# Altium PCB Game_Consol2.PcbDoc
Units mil, origin at the board's own origin, x right, y up, seen from the top; angles counter-clockwise.
Board outline 3090.55 x 1732.28 mil, 2 copper layers (Top Layer, Bottom Layer); 55 components, 43 nets, 220 pads, 69 vias.
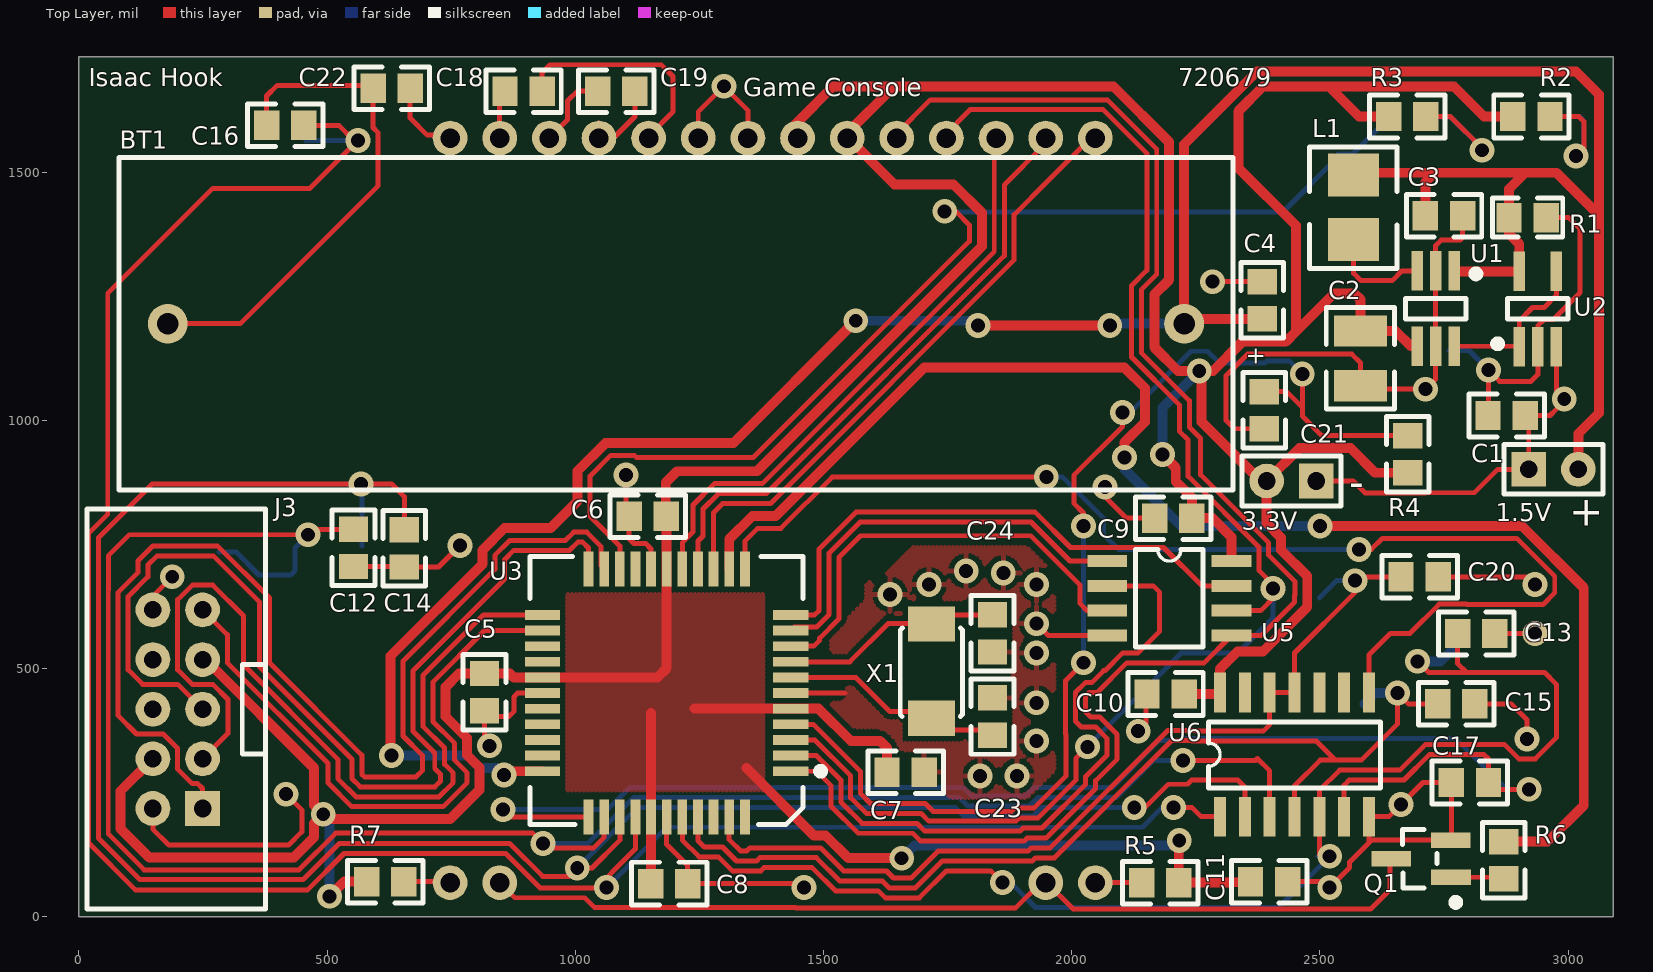
[diagram p0: Top Layer view]
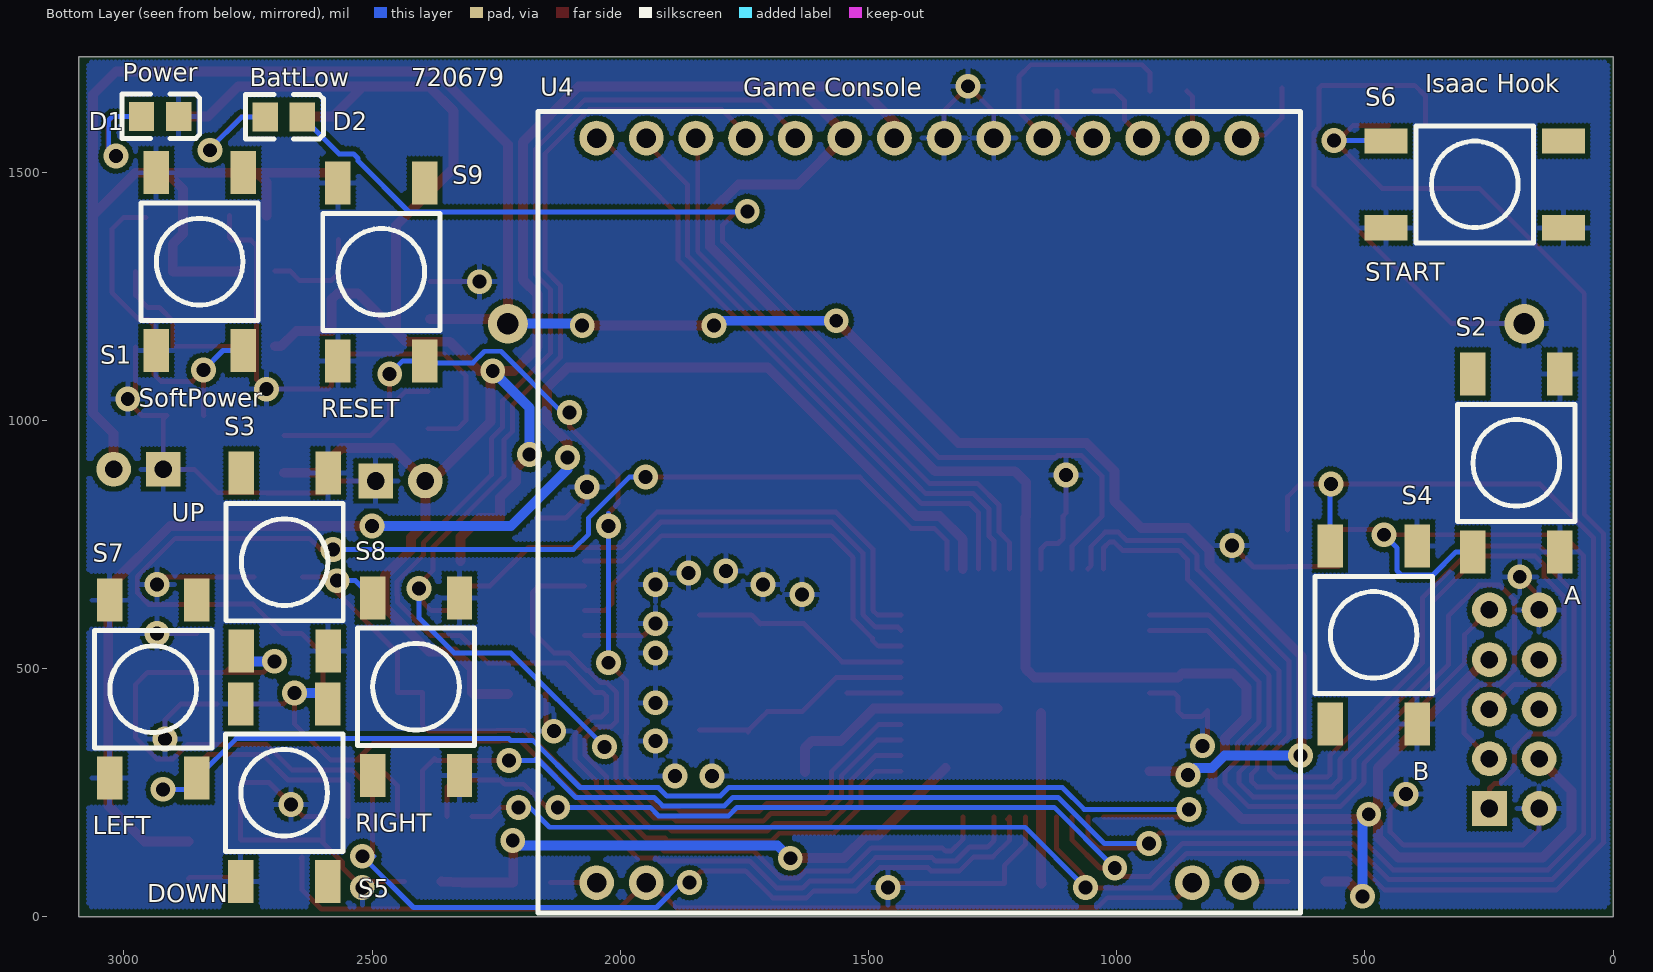
[diagram p1: Bottom Layer view, seen from below]
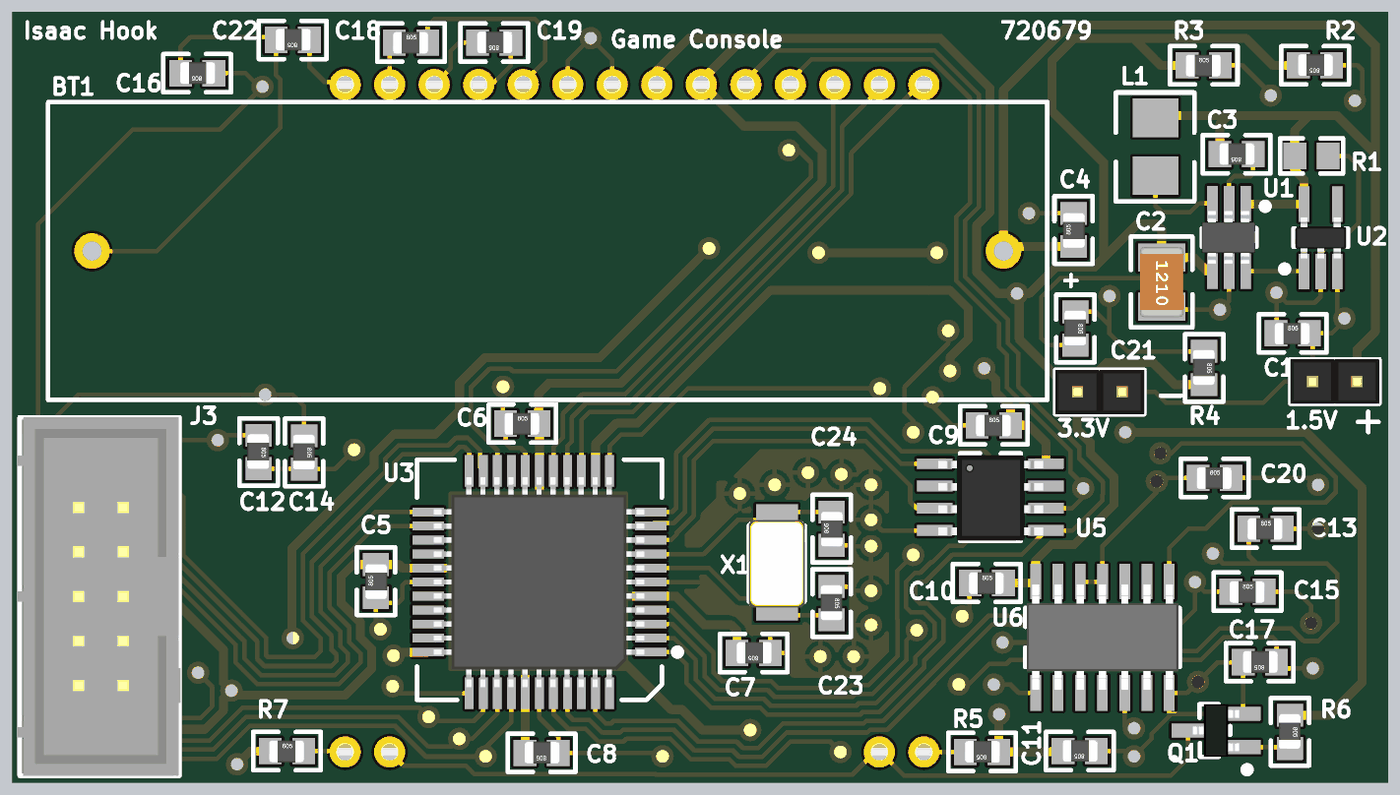
[diagram p2: 3D render of the assembled board from above, using the file's embedded part models]
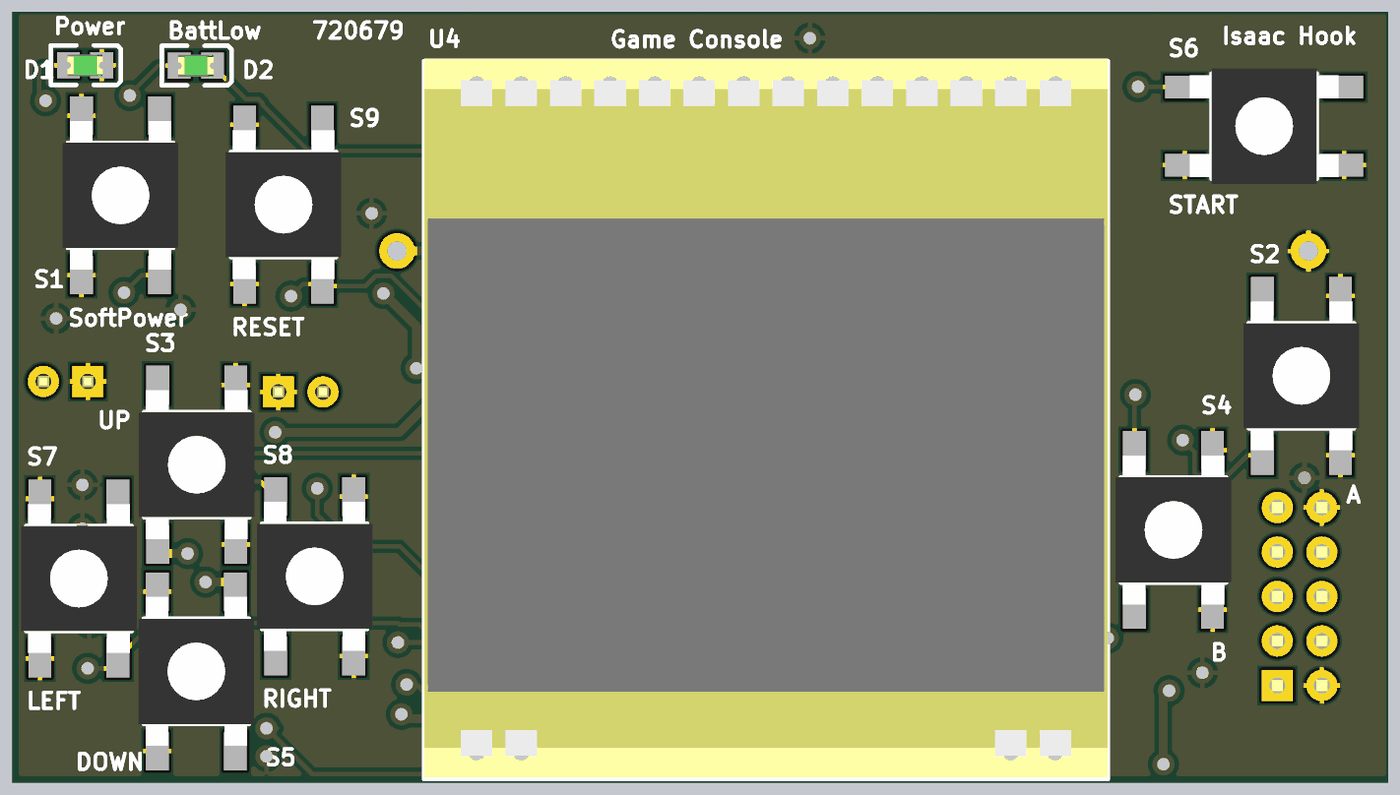
[diagram p3: 3D render of the assembled board from below, using the file's embedded part models]

## Layer stack, top to bottom
Top Solder: solder mask 0.4, Solder Resist, Dk 3.5
Top Layer: signal copper 1.4
Dielectric1: dielectric 12.6, FR-4, Dk 4.8
Bottom Layer: signal copper 1.4
Bottom Solder: solder mask 0.4, Solder Resist, Dk 3.5

## Board outline
0,0 0,1732.28 3090.55,1732.28 3090.55,0

## Design rules (kind name [scope] priority, off if disabled: settings)
Clearance [All] p1: gap=10
ComponentClearance [All] p1 off: gap=10 collisioncheckmode=3 verticalgap=10 showdistances=FALSE
DiffPairsRouting [All] p1: maxlimit=20 minlimit=10 mostfreqgap=10 toplayer_minwidth=15 toplayer_maxwidth=15 toplayer_prefwidth=15 bottomlayer_minwidth=15 bottomlayer_maxwidth=15 bottomlayer_prefwidth=15 maxuncoupledlength=500
FabricationTestPointUsage TestPointUsage [All] p1: valid=0 allowmultiple=FALSE
FabricationTestpoint Testpoint [All] p1: side=3 testpointundercomponent=TRUE minsize=40 maxsize=100 preferedsize=60 minholesize=0 maxholesize=40 preferedholesize=32 testpointgrid=1 allowsidetop=TRUE allowsidebottom=TRUE usegrid=TRUE gridtolerance=0.01
Height [All] p1: minheight=0 maxheight=7874.02 prefheight=500
HoleSize [All] p1: absolutevalues=TRUE maxlimit=199 minlimit=15 maxpercent=80.000 minpercent=20.000
MinimumAnnularRing [All] p1: minimumring=5
PolygonConnect [All] p1: connectstyle=Relief reliefconductorwidth=10 reliefentries=4 polygonreliefangle="90 Angle" airgapwidth=10
RoutingVias [All] p1: holewidth=20 width=40 viastyle="Through Hole" minholewidth=15 minwidth=25 maxholewidth=80 maxwidth=100
SilkToSolderMaskClearance SilkscreenOverComponentPads [IsPad] p1: minsilkscreentomaskgap=10 clearancetoexposedcopper=TRUE
SolderMaskExpansion [All] p1: expansion=6
Width [All] p1: maxlimit=1000 minlimit=6 preferedwidth=10 minimp=50.000000 maximp=50.000000 favimp=50.000000
23 further rules are at their usual default settings.

## Classes and differential pairs
component class Game_Consol_Top: C12 C13 C14 C15 C16 C17 C18 C19 C20 C21 C22 C23 C24 J3 Q1 R4 R5 R6 R7 S2 S3 S4 S5 S6 S7 S8 S9 U3 U4 U5 U6 X1
component class Game_Consol_Power: 1.5V 3.3V BT1 C1 C2 C3 C4 C5 C6 C7 C8 C9 C10 C11 D1 D2 L1 R1 R2 R3 S1 U1 U2

## Components (designator, comment, footprint, x,y, rotation, side; value= is the part's Value field where it differs from the comment)
1.5V "1.5V" HDR1X2 2920.67,901.57 r0 top
3.3V "3.3V" HDR1X2 2492.72,877.95 r180 top
BT1 "1.5v" BATT_HOLDER 1202.76,1194.88 r0 top
C1 "100nF" 0805 2875.98,1009.84 r0 top
C2 "22uF" 1210 2581.69,1125 r270 top
C3 "1uF" 0805 2750,1412.4 r180 top
C4 "100nF" 0805 2383.86,1242.13 r90 top
C5 "100nF" 0805 816.93,452.76 r90 top
C6 "100nF" 0805 1145.67,807.09 r0 top
C7 "100nF" 0805 1665.35,291.34 r180 top
C8 "100nF" 0805 1188.98,66.93 r180 top
C9 "100nF" 0805 2204.72,803.15 r0 top
C10 "100nF" 0805 2188.98,448.82 r0 top
C11 "100nF" 0805 2397.64,70.87 r180 top
C12 "BTN_A" 0805 553.15,743.11 r270 top
C13 "BTN_UP" 0805 2814.96,570.87 r0 top
C14 "BTN_B" 0805 655.51,742.13 r270 top
C15 "BTN_DOWN" 0805 2774.61,429.13 r0 top
C16 "BTN_Start" 0805 415.35,1594.49 r180 top
C17 "BTN_LEFT" 0805 2802.17,270.67 r180 top
C18 "1uF" 0805 895.67,1663.39 r0 top
C19 "1uF" 0805 1082.68,1663.39 r180 top
C20 "BTN_RIGHT" 0805 2700.79,685.04 r0 top
C21 "BTN_RESET" 0805 2387.8,1020.67 r270 top
C22 "1uF" 0805 629.92,1669.29 r180 top
C23 "18pF" 0805 1840.55,403.54 r270 top
C24 "18pF" 0805 1840.55,570.87 r90 top
D1 "Power" 0805D 2927.16,1612.2 r0 bottom
D2 "BattLow" 0805D 2678.15,1611.22 r0 bottom
J3 "JTAG" BOXEDVERT10 249.02,218.31 r90 top
L1 "4.7uH" 1210L 2567.91,1429.13 r90 top
Q1 "RTR025N03TL" SOT23 2703.74,117.13 r180 top
R1 "10k" 0805 2918.31,1408.46 r180 top
R2 "1k" 0805 2926.18,1612.2 r180 top
R3 "1k" 0805 2676.18,1612.2 r0 top
R4 "10k" 0805 2677.17,932.09 r270 top
R5 "10k" 0805 2178.15,68.9 r180 top
R6 "10k" 0805 2870.08,114.17 r270 top
R7 "10k" 0805 617.13,70.87 r0 top
S1 "SoftPower" SPNO_SMD 2847.44,1319.88 r270 bottom
S2 "A" SPNO_SMD 194.88,914.37 r90 bottom
S3 "UP" SPNO_SMD 2676.18,714.57 r90 bottom
S4 "B" SPNO_SMD 482.28,567.91 r90 bottom
S5 "DOWN" SPNO_SMD 2677.16,250 r270 bottom
S6 "START" SPNO_SMD 278.54,1475.39 r180 bottom
S7 "LEFT" SPNO_SMD 2940.94,458.66 r270 bottom
S8 "RIGHT" SPNO_SMD 2411.42,463.58 r90 bottom
S9 "RESET" SPNO_SMD 2481.3,1299.21 r270 bottom
U1 "SC120" SOT23-6 2733.27,1225.39 r270 top
U2 "74AUG1G80" SOT23-5 2938.98,1224.41 r90 top
U3 "ATMEGA16" QFP-48 1184.06,450.79 r180 top
U4 "EA DOGS102x-6" "EA DOGS102x" 1397.64,818.9 r180 bottom
U5 "FM25L04B" SOIC-8 2196.85,641.73 r0 top
U6 "74AHC30" SOIC-14 2448.82,326.77 r90 top
X1 "7.68Mhz" XTAL_FLAT_SMD 1717.52,495.08 r90 top

## Footprints (in the part's own frame and the unit in brackets; to place one, negate y for a bottom-side part, rotate by r counter-clockwise, add the part's x,y. Pads: shape width x height; smd on the part's side, far side on the other; paste and mask are expansions set on the pad)
0805 [mm] "0805 Footprint"
  rect 1.3x1.5 smd: 1(-0.95,0) 2(0.95,0)
  silkscreen extent -1.93,-1.09 1.93,1.09, body extent -1.03,-0.64 0.97,0.61, height 0.8
0805D [mm] "0805 Diode"
  rect 1.3x1.5 smd: A(0.95,0) K(-0.95,0)
  silkscreen extent -2.03,-1.14 1.95,1.12, body extent -1.01,-0.62 1.01,0.63, height 1.1
1210 [mm]
  rect 1.6x2.7 smd: 1(-1.4,0) 2(1.4,0)
  silkscreen extent -2.6,-1.75 2.6,1.75, body extent -2,-1.24 2,1.24, height 1.72
1210L [mm] "Precision Wire Wound Inductor, 2-Leads, Body 3.2x3.2mm, IPC Low Density"
  rect 2.2x2.6 smd: 1(-1.651,0) 2(1.651,0)
  silkscreen extent -3.12,-2.21 3.1,2.26, body extent -1.75,-1.75 1.75,1.75, height 2.2
BATT_HOLDER [mil]
  round 80 hole 43.31: 1(1023.62,0) 2(-1023.62,0)
  silkscreen extent -1122,-335 1122,335
BOXEDVERT10 [mil] "IDC Header 2.54mm Boxed 10 pins"
  rect 70x70 hole 35.43: 1(0,0)
  round 70 hole 35.43: 2(0,100) 3(100,0) 4(100,100) 5(200,0) 6(200,100) 7(300,0) 8(300,100) 9(400,0) 10(400,100)
  silkscreen extent -203,-127 603,232, body extent -204,-129 604,237, height 359
"EA DOGS102x" [mil] "graphics display footprint"
  round 70 hole 39.37: 1(-650,-750) 2(-550,-750) 13(550,-750) 14(650,-750) 15(650,750) 16(550,750) 17(450,750) 18(350,750) 19(250,750) 20(150,750) 21(50,750) 22(-50,750) 23(-150,750) 24(-250,750) 25(-350,750) 26(-450,750) 27(-550,750) 28(-650,750)
  silkscreen extent -768,-811 768,803, body extent -768,-807 768,807, height 213
HDR1X2 [mil] "Connector; Header; 2 Position"
  rect 70x70 hole 35.43: 1(0,0)
  round 70 hole 35.43: 2(100,0)
  silkscreen extent -50,-50 150,50, body extent -50,-50 150,50, height 333
QFP-48 [mm]
  rect 1.8x0.5 smd: 1(-6.35,4) 2(-6.35,3.2) 3(-6.35,2.4) 4(-6.35,1.6) 5(-6.35,0.8) 6(-6.35,0) 7(-6.35,-0.8) 8(-6.35,-1.6) 9(-6.35,-2.4) 10(-6.35,-3.2) 11(-6.35,-4) 23(6.35,-4) 24(6.35,-3.2) 25(6.35,-2.4) 26(6.35,-1.6) 27(6.35,-0.8) 28(6.35,0) 29(6.35,0.8) 30(6.35,1.6) 31(6.35,2.4) 32(6.35,3.2) 33(6.35,4)
  rect 0.5x1.8 smd: 12(-4,-6.35) 13(-3.2,-6.35) 14(-2.4,-6.35) 15(-1.6,-6.35) 16(-0.8,-6.35) 17(0,-6.35) 18(0.8,-6.35) 19(1.6,-6.35) 20(2.4,-6.35) 21(3.2,-6.35) 22(4,-6.35) 34(4,6.35) 35(3.2,6.35) 36(2.4,6.35) 37(1.6,6.35) 38(0.8,6.35) 39(0,6.35) 40(-0.8,6.35) 41(-1.6,6.35) 42(-2.4,6.35) 43(-3.2,6.35) 44(-4,6.35)
  silkscreen extent -8,-6.99 6.98,6.73, body extent -5.97,-6 6.03,6, height 1.13
SOIC-8 [mil] "SOIC-8 Footprint"
  rect 80x24 smd: 1(-125,75) 2(-125,25) 3(-125,-25) 4(-125,-75) 5(125,-75) 6(125,-25) 7(125,25) 8(125,75)
  silkscreen extent -68,-98 68,98, body extent -117,-98 119,94, height 67
SOIC-14 [mil] "SOIC-14 Footprint"
  rect 80x24 smd: 1(-125,150) 2(-125,100) 3(-125,50) 4(-125,0) 5(-125,-50) 6(-125,-100) 7(-125,-150)
  rect 80x24.02 smd: 8(125,-150) 9(125,-100) 10(125,-50) 11(125,0) 12(125,50) 13(125,100) 14(125,150)
  silkscreen extent -67,-173 66,173, body extent -118,-170 118,170, height 61
SOT23 [mil] "SOT23, 3-Leads, Body 3.0x2.5mm (max), Pitch 0.95mm, IPC Low Density"
  rect 80.24x31.5 smd: 1(-60,37.4)
  rect 80x31.5 smd: 2(-60,-37.4) 3(60,0)
  silkscreen extent -75,-59 37,93, body extent -52,-59 52,59, height 43
SOT23-5 [mm]
  rect 2.032x0.6 smd: 1(-1.929,0.95) 2(-1.929,0) 3(-1.929,-0.95) 4(1.929,-0.95) 5(1.929,0.95)
  silkscreen extent -1.9,-1.55 0.53,2.18, body extent -1.17,-1.46 1.17,1.46, height 1.02
SOT23-6 [mm]
  rect 2.032x0.6 smd: 1(-1.929,0.95) 2(-1.929,0) 3(-1.929,-0.95) 4(1.929,-0.95) 5(1.929,0) 6(1.929,0.95)
  silkscreen extent -1.9,-1.55 0.53,2.18, body extent -1.5,-1.56 1.5,1.49, height 1.42
SPNO_SMD [mm] "SP NO SMD Tactile switch"
  rect 2.2x1.3 smd: 1(-4.55,-2.225) 2(4.55,-2.225) 3(-4.55,2.225) 4(4.55,2.225)
  silkscreen extent -3,-3 3,3, body extent -4.25,-3.3 4.25,3.3, height 4.32
XTAL_FLAT_SMD [mm]
  rect 1.8x2.4 smd: 1(-2.413,0) 2(2.412,0)
  silkscreen extent -2.33,-1.59 2.21,1.6, body extent -2.58,-1.6 2.42,1.6, height 1.02

## Part data
1.5V 3.3V: library part HDR2, "2 Pin Header"
BT1: library part BAT, "Battery Holder AA 1.5v"
C1 C3 C4 C5 C6 C7 C8 C9 C10 C11 C12 C13 C14 C15 C16 C17 C18 C19 C20 C21 C22 C23 C24: library part "C 0805", "Capacitor 100nF"
C2: library part "C 1210", "Capacitor 22uF"
D1: library part "LED GREEN", "Light Emitting Diode"
D2: library part "LED RED", "Light Emitting Diode"
J3: library part JTAG_CON, "JTAG ATMEL connector"
L1: library part "I 1210", "Inductor 4.7uH"
Q1: library part MOSFET-N, "N-Channel MOSFET"
R1 R2 R3 R4 R5 R6 R7: library part R, "Resistor"
S1 S2 S3 S4 S5 S6 S7 S8 S9: library part SW-PB, "Push Button Switch"
U1: "Regulator Low Voltage"
U2: "Inverted single D flip flop"
U3: "ATMEGA16 Microcontroller"
U4: "LCD 102x64-pixel with backlight"
U5: "FRAM 4Kb Memory"
U6: "1 x 8 Input NAND gate"
X1: library part XTAL, "Crystal Oscillator"

## Via types
v1: diameter 50, hole 28, Top Layer to Bottom Layer, tented both sides, 69 vias

## Nets (pads, with @x,y where several pads share a name; then routed paths per layer and width w, separated by ;. In a path a pad name is that pad's centre, name@x,y a point inside that pad or via, vN(x,y) a via of type N, cw(c..) or ccw(c..) an arc to the next point about the centre after c; other vN are vias at no path point)
BATTERYLOWLED: D2.K U3.20 | length 2268.2
  Top Layer w10: U3.20 1089.57,747.05 1029.53,807.09 1029.53,887.8 1071.5,929.76 1118.93,929.76 1123.5,925.2 1358.29,925.2 1793.9,1360.8 1793.9,1393.7 1766.34,1421.26 v1(1744.09,1421.26) v1@1757.4,1407.95
  Bottom Layer w10: v1(1744.09,1421.26) 1745.31,1420.04 2425.51,1420.04 2528.31,1522.84 2528.31,1527.87 2537.09,1536.65 2566.18,1536.65 D2.K
BTN_A: C12.1 S2.3 U3.35 U6.3 | length 4118.9
  Top Layer w10: C12.1 472.44,780.51 v1(461.61,769.69) 101.69,769.69 59.37,727.36 59.37,658.26 59.02,657.91 59.02,167.1 131.32,94.8 443.23,94.8 517.05,168.62 914.06,168.62 v1(935.04,147.64) 944.25,138.43 1036.27,138.43 1058.07,160.23 U3.35 ; v1(2224.41,314.96) 2370.08,314.96 2374.02,318.9 2398.82,294.09 U6.3
  Bottom Layer w10: S2.3 316.39,735.24 362.88,688.74 426.49,688.74 435.28,697.53 435.28,743.35 v1(461.61,769.69) ; v1(935.04,147.64) 1024.87,147.64 1117.7,240.47 1773.1,240.47 1790.11,223.46 1914.62,223.46 1931.63,240.47 2089.42,240.47 2167.84,318.9 2171.78,314.96 v1(2224.41,314.96)
  Bottom Layer w20: v1(461.61,769.69) v1@461.61,777.3
BTN_B: C14.1 S4.4 U3.36 U6.2 | length 4186.8
  Top Layer w10: C14.1 655.51,846.46 629.92,872.05 v1(567.91,872.05) 147.64,872.05 39.37,763.78 39.37,666.55 39.02,666.19 39.02,158.82 123.03,74.8 451.51,74.8 524.39,147.68 867.85,147.68 934.06,81.48 986.99,81.48 v1(1003.94,98.43) 1033.46,98.43 1089.57,154.53 U3.36 ; v1(2125.98,220.47) 2148.16,220.47 2194.77,267.09 2233.1,267.09 2241.61,275.59 2334.65,275.59 2348.82,261.42 U6.2
  Bottom Layer w10: v1(567.91,872.05) 569.88,870.08 S4.4 ; v1(1003.94,98.43) 1125.98,220.47 1764.82,220.47 1781.83,203.46 1922.9,203.46 1939.91,220.47 v1(2125.98,220.47)
BTN_DOWN: C15.1 S5.3 U3.41 U6.4 | length 2065
  Top Layer w10: U3.41 1247.05,153.54 1259.84,140.75 1296.52,140.75 1324.67,112.6 1365.29,112.6 1371.75,119.06 1485.48,119.06 1532.35,72.19 1618.55,72.19 1632.63,58.11 1684.82,58.11 1739.31,112.6 1920.63,112.6 1926.93,118.9 1965.36,118.9 2070.87,224.41 2070.87,224.72 2201.11,354.96 2240.98,354.96 2241.92,354.02 2492.98,354.02 2531.4,315.59 ; U6.4 2448.82,263.78 2500.63,315.59 2531.4,315.59 ; C15.1 2678.15,429.13 v1(2656.5,450.79) 2656.5,388.78 2583.31,315.59 2531.4,315.59
  Bottom Layer w20: S5.3 2611.22,450.79 v1(2656.5,450.79)
BTN_LEFT: C17.1 S7.4 U3.34 U6.6 | length 2890.2
  Top Layer w10: v1(854.33,216.54) 870.08,200.79 U3.34 ; U6.6 2548.82,265.35 2559.06,275.59 2669.29,275.59 2720.47,326.77 2830.71,326.77 2839.57,317.91 C17.1 2853.35,256.89 v1(2921.26,256.89)
  Bottom Layer w10: v1(854.33,216.54) 1065.48,216.54 1109.42,260.47 1781.39,260.47 1798.39,243.46 1906.33,243.46 1923.34,260.47 2081.13,260.47 2175.62,354.96 2220.47,354.96 2224.41,358.9 2773.98,358.9 S7.4 2875.98,256.89 v1@2919.29,256.89 ; v1(2921.26,256.89) v1@2919.29,256.89 ; v1@2927.16,249.02 v1@2919.29,256.89
BTN_RESET: C21.1 R4.1 S9.4 U3.4 | length 2350.8
  Top Layer w10: U3.4 1479.33,387.8 1574.8,292.32 1574.8,248.03 1594.49,228.35 1704.72,228.35 1720.47,212.6 1879.21,212.6 1885.51,218.9 1923.62,218.9 1988.19,283.46 1988.19,367.27 1987.56,367.9 1987.56,475.75 v1(2023.62,511.81) ; v1(2023.62,787.4) 2023.62,813.51 2004.3,832.84 2004.3,889.4 2102.36,987.46 v1(2102.36,1015.75) ; C21.1 2433.07,1058.07 2464.57,1026.57 ; v1(2464.57,1093.5) 2464.57,1026.57 ; R4.1 2503.94,969.49 2464.57,1008.86 2464.57,1026.57
  Bottom Layer w10: v1(2023.62,511.81) v1(2023.62,787.4) 2023.62,812.99 ; v1@2102.36,1023.62 v1(2102.36,1015.75) 2116.66,1015.75 2240.32,1139.41 2273.46,1139.41 2296.89,1115.98 2389.6,1115.98 S9.4 2437.99,1120.08 v1(2464.57,1093.5)
BTN_RIGHT: C20.1 S8.4 U3.43 U6.11 U6.12 | length 1880.7
  Top Layer w10: U3.43 1310.04,155.51 1332.95,132.6 1344.98,132.6 1351.44,139.06 1493.77,139.06 1540.63,92.19 1626.83,92.19 1640.91,78.11 1676.54,78.11 1731.02,132.6 1912.34,132.6 1918.64,138.9 1956.76,138.9 2192.82,374.96 2249.26,374.96 2250.21,374.02 2385.83,374.02 2398.82,387.01 U6.12 U6.11 2448.82,531.5 2570.87,653.54 v1(2570.87,677.16) 2562.99,677.16 2555.12,685.04 C20.1@2639.76,685.04
  Bottom Layer w10: S8.4 2533.46,677.16 v1(2570.87,677.16)
BTN_SP_CLK: C1.1 R1.1 S1.4 U2.2 | length 719.4
  Top Layer w10: C1.1 2839.57,1010.83 v1(2839.57,1101.38) 2862.2,1078.74 2925.2,1078.74 2938.98,1092.52 U2.2 2938.98,1190.94 2951.51,1203.48 2969.95,1203.48 3024.21,1257.74 3024.21,1385.24 3000.98,1408.47 R1.1
  Bottom Layer w10: S1.4 2800.2,1140.75 v1(2839.57,1101.38)
BTN_START: C16.1 S6.3 U3.37 U6.1 | length 4581.1
  Top Layer w10: C16.1 523.62,1594.49 554.13,1563.98 v1(562.01,1563.98) 465.55,1467.52 269.69,1467.52 58.07,1255.91 58.07,810.76 19.02,771.71 19.02,150.38 18.43,149.79 114.36,53.86 460.19,53.86 534.01,127.68 859.57,127.68 928.82,58.43 1062.36,58.43 v1(1062.99,59.06) ; v1@1062.99,78.73 1082.68,98.42 1121.06,136.81 U3.37 ; v1(2204.72,220.47) 2242.12,220.47 2260.83,201.77 U6.1
  Bottom Layer w10: S6.3 458.66,1563.98 v1(562.01,1563.98) ; v1(1062.99,59.06) 1184.41,180.47 2142.55,180.47 2182.55,220.47 v1(2204.72,220.47)
BTN_UP: C13.1 S3.3 U3.40 U6.5 | length 2794.4
  Top Layer w10: U3.40@1219.75,196.59 U3.40 1215.55,154.53 1249.33,120.75 1288.23,120.75 1316.38,92.6 1373.58,92.6 1380.03,99.06 1477.2,99.06 1524.06,52.19 1610.26,52.19 1624.34,38.11 1693.1,38.11 1747.59,92.6 1836.54,92.6 v1(1860.24,68.9) ; v1(2519.69,122.05) 2501.58,122.05 2498.82,124.8 U6.5 2498.82,254.72 2539.69,295.59 2661.01,295.59 2712.19,346.77 2872.25,346.77 2900.75,318.27 2933.89,318.27 2976.38,360.75 2976.38,468.5 2952.76,492.13 2795.28,492.13 ; v1(2696.85,514.76) 2719.49,492.13 2795.28,492.13 ; C13.1 2777.56,509.84 2795.28,492.13
  Bottom Layer w10: v1(1860.24,68.9) 1876.93,68.9 1926.93,18.9 2416.54,18.9 v1(2519.69,122.05) v1@2496.06,122.05
  Bottom Layer w20: v1(2696.85,514.76) 2743.11,514.76 S3.3
GND: 1.5V.1 3.3V.1 BT1.2 C1.2 C2.2 C3.1 C4.2 C5.1 C6.1 C7.1 C8.1 C9.1 C10.1 C11.1 C12.2 C13.2 C14.2 C15.2 C16.2 C17.2 C20.2 C21.2 C22.2 C23.1 C24.1 D1.K J3.2 J3.10 Q1.2 S1.1 S1.2 S2.1 S2.2 S3.1 S3.2 S4.1 S4.2 S5.1 S5.2 S6.1 S6.2 S7.1 S7.2 S8.1 S8.2 S9.1 S9.2 U1.2 U1.5 U2.3 U3.6 U3.18 U3.28 U3.39 U4.20 U4.21 U5.4 U6.7 | length 6447.1
  Top Layer w10: J3.2 149.02,176.77 180.98,144.8 422.52,144.8 448.96,171.24 448.96,215.41 v1(417.32,247.05) ; J3.10 149.02,646.06 v1(187.99,685.04) ; BT1.2 324.8,1194.88 602.01,1472.09 602.01,1580.54 592.52,1590.03 C22.2 586.61,1675.2 399.61,1675.2 377.95,1653.54 C16.2 ; C12.2 654.53,705.71 C14.2 724.41,704.72 v1(767.72,748.03) ; v1(826.77,344.49) 816.93,354.33 C5.1 828.74,403.54 866.14,403.54 875.98,413.39 875.98,442.91 883.86,450.79 U3.28 ; v1(1102.36,889.76) 1102.36,812.99 C6.1 1108.27,761.81 1118.11,751.97 1141.73,751.97 1152.56,741.14 U3.18 ; U3.39 1184.06,145.67 1226.38,103.35 C8.1 v1@1452.76,66.93 ; U4.20 1247.64,1621.65 v1(1299.21,1673.23) 1347.64,1624.8 U4.21 ; U3.6 1543.68,450.79 ; v1(1929.13,590.55) 1952.95,566.73 U5.4 ; v1(2066.93,866.14) 2066.93,846.46 2110.24,803.15 C9.1 ; v1(2133.86,374.02) 2149.61,389.76 2149.61,446.85 C10.1 ; v1(2283.46,1279.53) C4.2 ; C21.2 2327.76,983.27 2311.02,1000 2311.02,1090.55 2353.98,1133.5 2564.33,1133.5 2581.69,1116.14 C2.2 2588.58,1062.99 v1(2712.6,1062.99) 2713.58,1062.99 2733.27,1082.68 U1.5 U1.2 2733.27,1352.36 2744.1,1363.19 2782.48,1363.19 2787.4,1368.11 C3.1 ; C11.1 2507.87,70.87 v1(2519.69,59.06) 2559.69,99.06 2559.69,110.03 2598.82,149.17 ; 3.3V.1 2566.93,877.95 2590.79,854.09 2712.91,854.09 2713.14,854.33 2811.02,854.33 2858.27,901.57 1.5V.1 2920.67,1002.56 C1.2 2963.58,1009.84 2976.38,1022.64 ; C20.2 2917.32,685.04 v1(2933.07,669.29) ; C15.2 2885.1,429.13 2917.32,396.91 v1(2917.32,358.27) ; C13.2 v1(2933.07,570.87) ; U2.3 2976.38,1059.06 v1(2992.13,1043.31) ; 2598.82,149.17 U6.7 2638.78,201.77 v1(2663.39,226.38) 2707.68,270.67 C17.2 2764.76,155.55 Q1.2 2604.18,154.53 2598.82,149.17
  other v1: 1460.63,59.06 1814.96,283.46 1889.77,283.46 1929.13,354.33 1929.08,431.12 1929.08,531.52 1633.86,649.61 1712.6,669.29 1929.13,669.29 1862.2,692.91 1787.4,696.85
LCD_CD: U3.16 U4.26 | length 1190.7
  Top Layer w10: U3.16 1215.55,753.94 1237.2,775.59 1237.2,829.72 1280.12,872.64 1376.44,872.64 1843.9,1340.09 U4.26@1843.9,1574.8
LCD_CS: U3.14 U4.28 | length 1267
  Top Layer w10: U3.14 1278.54,814.49 1296.69,832.64 1393.4,832.64 1884.17,1323.41 1884.17,1414.69 1920.27,1450.79 1920.27,1451.17 2043.9,1574.8 U4.28@2024.61,1574.8
LCD_PWM: R6.1 U3.13 | length 2893.1
  Top Layer w20: U3.13 1310.04,760.83 1356.85,807.64 1403.76,807.64 1702.42,1106.3 2106.64,1106.3 2147.36,1065.57 2147.36,997.11 2106.3,956.05 v1(2106.3,925.19) v1@2106.94,925.19 ; v1(2500,787.4) 2906.88,787.4 3031.5,662.79 3031.5,224.41 2958.66,151.57 R6.1
  Bottom Layer w20: v1(2106.3,925.19) 2106.3,901.57 2220.47,787.4 v1(2500,787.4)
LCD_RESET: U3.15 U4.27 | length 1286.7
  Top Layer w10: U3.15 1247.05,757.15 1257.2,767.31 1257.2,821.44 1288.4,852.64 1384.73,852.64 1440.75,908.66 ; 1393.21,860.73 1864.17,1331.69 1864.17,1474.41 1943.9,1554.13 U4.27@1943.9,1574.8
MC_MISO: U3.2 U5.2 | length 1378.5
  Top Layer w10: U3.2 1485.75,324.8 1534.8,275.75 1534.8,231.46 1577.92,188.35 1688.16,188.35 1703.9,172.6 1895.78,172.6 1902.08,178.9 1940.19,178.9 2028.19,266.9 2028.19,282.64 2071.5,325.95 2071.5,359.09 2048.06,382.52 2019.27,382.52 2007.56,394.24 2007.56,452.13 2027.24,471.81 2040.19,471.81 2064.22,495.84 2066.93,495.84 2102.9,531.81 2133.86,531.81 2177.17,575.12 2177.17,653.54 2163.98,666.73 U5.2
MC_MOSI: U3.1 U4.24 U5.5 | length 3132.1
  Top Layer w10: U3.1 1486.4,293.31 1514.8,264.91 1514.8,223.18 1569.64,168.35 1679.87,168.35 1695.62,152.6 1904.06,152.6 1910.36,158.9 1948.48,158.9 2048.19,258.61 2048.19,274.36 2091.5,317.67 2091.5,367.37 2056.35,402.52 2038.43,402.52 2028.19,412.76 2028.19,444.47 2035.53,451.81 2051.18,451.81 2111.18,511.81 2266.93,511.81 U5.5 2381.69,566.73 2448.82,633.86 2448.82,648.16 2449.45,648.79 2449.45,675.97 2396.85,728.56 2396.85,753.4 2259.84,890.41 2259.84,963.66 2236.81,986.69 2236.81,1039.76 2140.35,1136.22 2140.35,1263.31 2171.26,1294.22 2171.26,1546.44 2071.71,1645.98 1715.08,1645.98 U4.24@1643.9,1574.8
MC_SCK: U3.3 U4.25 U5.6 | length 2909.3
  Top Layer w10: U3.3 1482.54,356.3 1554.8,284.04 1554.8,239.75 1586.2,208.35 1696.44,208.35 1712.19,192.6 1887.49,192.6 1893.79,198.9 1931.91,198.9 2008.19,275.18 2008.19,319.21 v1(2031.5,342.52) ; U4.25@1743.9,1574.8 1795.08,1625.98 2063.43,1625.98 2151.26,1538.15 2151.26,1302.5 2120.35,1271.6 2120.35,1127.94 2216.81,1031.48 2216.81,978.41 2234.59,960.63 2234.59,887.38 2376.85,745.12 2376.85,697.95 2405.51,669.29 v1(2405.51,661.42) 2405.51,649.6 2409.45,645.67 2380.51,616.73 U5.6
  Bottom Layer w10: v1(2031.5,342.52) 2220.47,531.5 2334.65,531.5 2405.51,602.36 v1(2405.51,661.42)
NAND_Y': U3.12 U6.8 | length 2397.4
  Top Layer w10: U3.12 1341.53,756.96 1367.21,782.64 1414.11,782.64 1517.3,885.83 v1(1948.82,885.83) ; v1(2578.74,740.16) 2603.74,740.16 2625.98,762.4 2896.53,762.4 2973.07,685.86 2973.07,652.72 2949.64,629.29 2795.91,629.29 2795.28,629.92 2740.16,629.92 2681.1,570.87 2641.73,570.87 2598.82,527.95 U6.8
  Bottom Layer w10: v1(1948.82,885.83) 1981.77,885.83 2063.62,803.97 2063.62,771.02 2094.49,740.16 v1(2578.74,740.16)
NetC18_1: C18.1 U4.16 | length 114
  Top Layer w10: U4.16@835.63,1575.79 U4.16@847.64,1575.79 ; U4.16 U4.16@847.64,1575.79 ; U4.16@850.79,1575.79 U4.16@847.64,1575.79 ; C18.1 847.64,1652.76 U4.16@847.64,1575.79
NetC18_2: C18.2 U4.19 | length 461.9
  Top Layer w10: C18.2 933.07,1700.79 948.82,1716.54 1173.23,1716.54 1196.85,1692.91 1196.85,1622.05 1147.64,1572.84 U4.19
NetC19_1: C19.1 U4.18 | length 171.5
  Top Layer w10: U4.18@1047.64,1598.82 U4.18 1076.77,1568.9 1120.08,1612.21 C19.1
NetC19_2: C19.2 U4.17 | length 166
  Top Layer w10: U4.17@943.9,1574.8 U4.17@947.64,1574.8 ; U4.17@950.79,1568.9 U4.17 984.25,1605.51 984.25,1643.7 1003.94,1663.39 C19.2
NetC22_1: C22.1 U4.15 | length 150.9
  Top Layer w10: C22.1 667.32,1609.25 701.77,1574.8 U4.15@743.9,1574.8
NetC23_2: C23.2 U3.7 X1.1 | length 451.9
  Top Layer w10: U3.7 1564.96,482.28 1633.86,413.39 1704.23,413.39 X1.1 1741.63,375.98 C23.2@1840.55,375.98 ; X1.1@1742.13,373.52 X1.1@1743.11,372.54
NetC24_2: C24.2 U3.8 X1.2 | length 446
  Top Layer w10: U3.8 1553.15,513.78 1629.92,590.55 1717.03,590.55 X1.2 1735.73,608.27 C24.2
NetD1_A: D1.A R2.1 | length 297.7
  Top Layer w10: R2.1 3021.65,1612.21 3032.01,1601.85 3032.01,1547.76 3016.81,1532.56 v1(3015.74,1532.56)
  Bottom Layer w10: D1.A 3023.62,1612.21 3030.51,1605.32 3030.51,1546.26 3016.81,1532.56 v1(3015.74,1532.56)
NetD2_A: D2.A R3.2 | length 284.3
  Top Layer w10: R3.2 2762.8,1612.2 2826.77,1548.23 v1(2826.77,1544.29)
  Bottom Layer w10: D2.A 2762.79,1611.22 2826.77,1547.24 v1(2826.77,1544.29)
NetL1_1: L1.1 U1.3 | length 210.2
  Top Layer w10: L1.1 2567.91,1296.26 2582.68,1281.5 2645.67,1281.5 2665.5,1301.32 U1.3
NetQ1_1: Q1.1 R6.2 | length 107.6
  Top Layer w10: Q1.1 2867.13,79.72 R6.2
NetQ1_3: Q1.3 U4.2 U4.13 | length 1946.3
  Top Layer w10: U4.13@843.9,74.8 U4.13@847.64,74.8 ; U4.13 878.11,38.43 1018.8,38.43 1038.17,19.06 1444.06,19.06 1445.01,18.11 1887.2,18.11 1937.99,68.9 U4.2 ; U4.2@1948.72,69.98 2002.95,15.75 2602.36,15.75 2640.79,54.17 2640.79,120.08 Q1.3
NetR5_2: R5.2 U4.1 | length 99.3
  Top Layer w10: U4.1@2043.9,74.8 2049.8,68.9 R5.2
NetR7_2: R7.2 U4.14 | length 91
  Top Layer w10: R7.2 739.96,70.87 U4.14@743.9,74.8
RAM_CS: U3.10 U5.1 | length 833.4
  Top Layer w10: U3.10 1440.71,583.43 1485.73,583.43 1511.14,608.84 1511.14,732.69 1573.72,795.28 1918.05,795.28 1996.59,716.73 U5.1
RAM_HOLD: U3.11 U5.7 | length 1107.6
  Top Layer w10: U3.11 1482.28,608.27 1491.14,617.13 1491.14,740.98 1565.44,815.28 1926.33,815.28 1997.51,744.09 2185.04,744.09 2262.4,666.73 U5.7
RAM_WP: U3.9 U5.3 | length 889.5
  Top Layer w10: U3.9 1480.32,545.28 1492.13,557.09 1492.13,561.28 1531.14,600.3 1531.14,724.41 1574.45,767.72 1917.32,767.72 2016.85,668.19 2016.85,630.79 2030.9,616.73 U5.3
"SOFT POWER": U1.6 U2.1 U2.4 | length 328
  Top Layer w10: U1.6 2900.59,1149.46 U2.1 2901.58,1200.79 2928.15,1227.36 2951.77,1227.36 2976.38,1251.97 U2.4
TCK: J3.1 U3.21 | length 2326.6
  Top Layer w10: J3.1 249.02,258.46 239.17,268.31 228.31,268.31 199.02,297.6 199.02,339.02 169.73,368.31 115.94,368.31 79.02,405.24 79.02,653.56 118.78,693.32 118.78,716.95 149.2,747.36 278.95,747.36 384.17,642.14 384.17,511.51 569.94,325.74 569.94,286.68 574.76,281.85 679.13,281.85 692.28,295 692.28,324.8 652.91,364.17 652.91,515.12 837.72,699.92 837.72,728.21 867.7,758.19 979.9,758.19 996.64,774.92 1023.05,774.92 1051.42,746.55 1051.42,707.44 U3.21
TDI: J3.9 U3.24 | length 1268.5
  Top Layer w10: J3.9 299.02,568.31 299.02,511.81 501.65,309.17 501.65,294.96 501.65,270.11 549.91,221.85 733.66,221.85 782.09,270.28 782.09,290.18 756.77,315.49 756.77,349.61 713.19,393.19 713.19,403.54 ; 712.91,403.54 712.91,472.68 817.01,576.77 U3.24
TDO: J3.3 U3.23 | length 1789.5
  Top Layer w10: J3.3@249.02,330.71 J3.3 300.2,369.49 300.2,437.84 269.73,468.31 228.31,468.31 199.02,497.6 199.02,639.02 228.31,668.31 269.73,668.31 331.38,606.65 331.38,507.73 521.65,317.46 521.65,278.39 558.2,241.85 725.38,241.85 753.8,270.28 753.8,290.18 736.77,307.21 736.77,340 692.91,383.86 692.91,486.22 814.96,608.27 U3.23
TMS: J3.5 U3.22 | length 2110.8
  Top Layer w10: J3.5@219.73,418.31 J3.5 199.02,468.31 128.31,468.31 99.02,497.6 99.02,645.28 138.78,685.04 138.78,708.66 157.48,727.36 270.67,727.36 364.17,633.86 364.17,503.22 549.94,317.46 549.94,278.39 566.48,261.85 717.09,261.85 728.35,273.1 728.35,287.35 716.77,298.92 716.77,330.16 672.91,374.02 672.91,495.75 857.72,680.55 857.72,719.92 875.98,738.19 988.19,738.19 1004.92,754.92 1014.76,754.92 1026.57,743.11 U3.22
VBATT: 1.5V.2 BT1.1 C3.2 C4.1 L1.2 R1.2 U1.1 U2.5 U3.33 | length 5656.4
  Top Layer w20: v1(629.92,324.8) 627.91,326.81 627.91,525.47 812.72,710.28 812.72,738.56 857.34,783.19 950.51,783.19 1004.53,837.21 1004.53,898.15 1061.14,954.76 1318.94,954.76 v1(1564.96,1200.79) ; v1(856.3,285.43) 864.17,293.31 U3.33 ; v1(1811.02,1190.94) v1(2076.77,1190.94) ; C4.1 2236.22,1204.73 BT1.1 2226.38,1556.1 2373.03,1702.76 3015.75,1702.76 3062.01,1656.5 3062.01,1413.39 ; L1.2 2572.8,1499.02 2731.3,1499.02 ; C3.2 2712.6,1480.31 2731.3,1499.02 ; U1.1 2771.65,1300.34 U2.5 2901.58,1355.31 2880.91,1375.98 R1.2 2880.91,1466.53 2913.39,1499.02 ; 1.5V.2@3026.57,907.48 1.5V.2 3020.67,973.43 3062.01,1014.76 3062.01,1413.39 ; 2731.3,1499.02 2913.39,1499.02 ; 2913.39,1499.02 2976.38,1499.02 3062.01,1413.39
  Bottom Layer w20: v1(629.92,324.8) 782.82,324.8 808.13,299.49 842.24,299.49 v1(856.3,285.43) ; v1(1564.96,1200.79) 1801.18,1200.79 v1(1811.02,1190.94) ; v1@2076.77,1194.88 BT1.1
VCC: 3.3V.2 C2.1 C5.2 C6.2 C7.2 C8.2 C9.2 C10.2 C11.2 J3.4 J3.7 R2.2 R3.1 R4.2 R5.1 R7.1 U1.4 U3.5 U3.17 U3.27 U3.38 U4.22 U4.23 U5.8 U6.14 | length 11091.9
  Top Layer w20: J3.4 84.02,253.31 84.02,177.46 141.67,119.8 432.87,119.8 473.96,160.89 473.96,188.52 v1(492.13,206.69) ; J3.7 255.08,518.31 473.96,299.43 473.96,224.86 v1(492.13,206.69) ; v1(504.92,41.34) 534.45,70.87 R7.1 ; C8.2 1152.56,67.91 U3.38 1152.56,410.67 ; 1240.39,419.29 U3.5 1490.16,419.29 1555.12,354.33 1614.17,354.33 1627.95,340.55 C7.2 ; 1344.82,299.53 1480.29,164.06 1504.12,164.06 1550.07,118.11 v1(1657.48,118.11) ; U4.22@1443.9,1574.8 1443.9,1597.44 1519.21,1672.76 1641.85,1672.76 ; v1(2183.07,931.1) 2209.59,904.58 2209.59,877.03 2242.13,844.49 C9.2 2283.46,803.15 2321.85,764.76 U5.8 ; v1(2216.54,153.54) 2215.55,152.56 R5.1 2318.9,68.9 C11.2 ; C10.2 2295.87,448.82 U6.14 2298.82,499.61 2333.95,534.73 2385.05,534.73 2474.45,624.13 2474.45,686.32 2421.85,738.92 2421.85,763.76 2392.13,793.48 2392.13,877.37 3.3V.2 ; R3.1 2578.74,1612.2 2518.19,1672.76 ; R4.2 2611.22,894.68 2561.42,944.49 2459.25,944.49 3.3V.2 ; U1.4 2683.21,1149.46 2652.56,1180.12 C2.1 2581.69,1244.09 2569.88,1255.91 2528.54,1255.91 2451.77,1179.13 ; R2.2 2830.71,1612.21 2770.16,1672.76 2518.19,1672.76 ; v1(492.13,206.69) 501.97,196.85 748.03,196.85 807.09,255.91 807.09,300.53 781.77,325.85 781.77,359.96 738.19,403.54 738.19,462.6 765.75,490.16 C5.2 868.11,490.16 875.98,482.28 U3.27 1165.45,482.28 1184.05,500.89 U3.17 1184.05,804.14 1182.09,806.1 1182.09,875 1204.72,897.64 1366.09,897.64 1818.9,1350.45 1818.9,1418.31 1761.81,1475.39 1643.31,1475.39 1543.9,1574.8 1641.85,1672.76 ; 1641.85,1672.76 2084.13,1672.76 2196.38,1560.51 2196.38,1283.46 2166.38,1253.46 2166.38,1147.39 2214.36,1099.41 v1(2256.89,1099.41) ; v1(2256.89,1099.41) 2284.53,1099.41 2343.62,1158.5 2431.14,1158.5 2451.77,1179.13 ; v1(2256.89,1099.41) 2261.81,1094.49 2261.81,997.05 2380.91,877.95 3.3V.2 ; 2451.77,1179.13 2451.77,1392.72 2335.63,1508.86 2335.63,1622.93 2385.46,1672.76 2518.19,1672.76
  Bottom Layer w20: v1(492.13,206.69) 504.92,193.9 v1(504.92,41.34) ; v1(1657.48,118.11) 1683.27,143.9 2206.89,143.9 v1(2216.54,153.54) ; v1(2183.07,931.1) 2183.07,1025.59 v1(2256.89,1099.41)
pads on no net: J3.6 J3.8 S1.3 S2.4 S3.4 S4.3 S5.4 S6.4 S7.3 S8.3 S9.3 U3.19 U3.25 U3.26 U3.29 U3.30 U3.31 U3.32 U3.42 U3.44 U6.9 U6.10 U6.13

## Polygon pours and split planes (outlines as drawn)
GND on Top Layer "Top Layer-No Net" (hatched 90Degree grid 8 track 10, remove dead copper, pour order 22): 1507.87,519.69 1515.75,527.56 1515.75,566.93 1547.24,598.43 1586.61,637.8 1586.61,673.23 1610.24,673.23 1665.35,728.35 1681.1,744.09 1838.58,744.09 1909.45,744.09 1968.5,685.04 1964.57,681.1 1964.57,311.02 1964.57,295.28 1917.32,248.03 1909.45,240.16 1759.84,240.16 1755.91,240.16 1625.98,370.08 1614.17,381.89 1555.12,381.89 1555.12,385.83 1507.87,433.07 1503.94,437.01 1503.94,482.28 1564.96,482.28 1633.86,413.39 1645.67,413.39 1653.54,413.39 1661.42,405.51 1669.29,397.64 1669.29,362.2 1767.72,362.2 1771.65,366.14 1803.15,334.65 1818.9,334.65 1877.95,334.65 1881.89,338.58 1881.89,649.61 1791.34,649.61 1787.4,645.67 1771.65,629.92 1759.84,629.92 1673.23,629.92 1669.29,633.86 1661.42,625.98 1661.42,590.55 1629.92,590.55 1562.99,523.62 1562.99,515.75 1507.87,515.75 1503.94,519.69
VCC on Top Layer "Top Layer-No Net" (hatched 90Degree grid 8 track 10, pour order 26): 984.25,649.61 1377.95,649.61 1377.95,255.91 984.25,255.91
GND on Bottom Layer "Top Layer-No Net" (hatched 90Degree grid 8 track 10, remove dead copper, pour order 44): 9.84,1722.44 3070.87,1722.44 3070.87,19.69 9.84,19.69

## Other copper
Top Layer:
  region net BTN_B: 39.37,666.55 39.37,763.78

## Silkscreen, mask and mechanical layers (free items; w line width, h text height)
Top Overlay:
  text "Isaac Hook" at 19.69,1673.23 h36
  text "720679" at 2214.57,1673.23 h36
  text "Game Console" at 1338.58,1653.54 h36
  text "-" at 2559.06,846.46 h60
  text "+" at 3001.97,787.4 h60
Bottom Overlay:
  text "720679" at 2421.26,1673.23 h36
  text "Isaac Hook" at 377.95,1661.42 h36
  text "Game Console" at 1751.97,1653.54 h36
Mechanical 1:
  the board outline again, w10

## Text inside footprints (layer, text, board x,y; h text height)
BT1: Top Overlay "+" at 2350.39,1114.17 h36